# Altium PCB UNIT_V3_LVDS_Board.PcbDoc
Units mil, origin at the board's own origin, x right, y up, seen from the top; angles counter-clockwise.
Board outline 1775 x 3445 mil, 4 copper layers (Top Layer, Signal Layer 1, Signal Layer 2, Bottom Layer), stack 30.634 mil thick; 22 components, 97 nets, 269 pads, 87 vias.
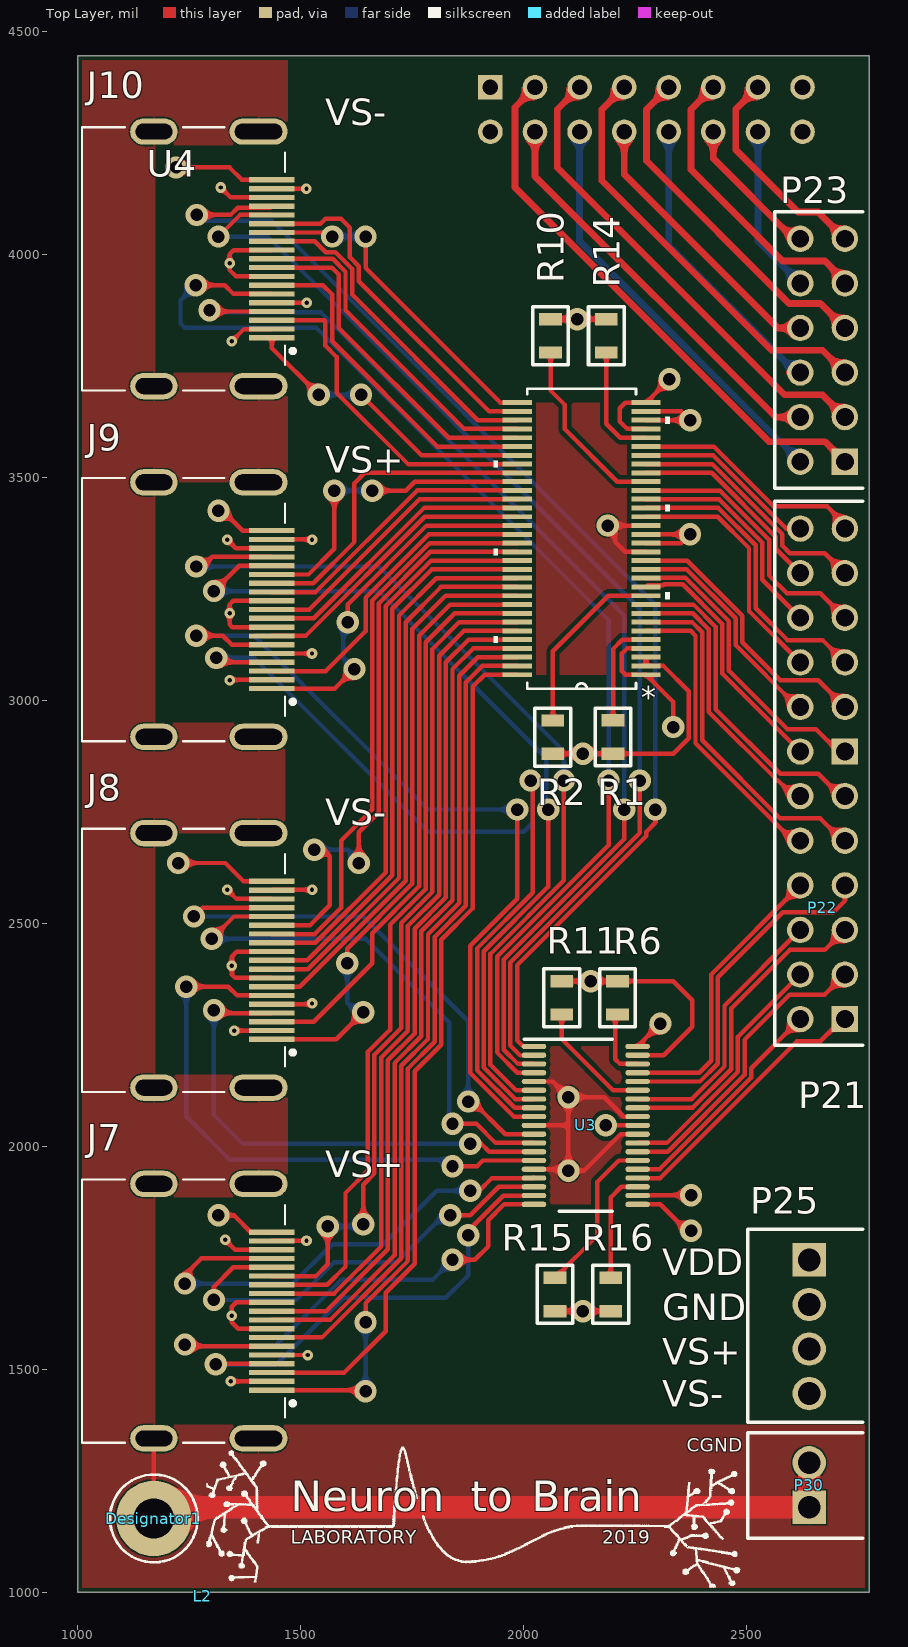
[diagram p0: Top Layer view]
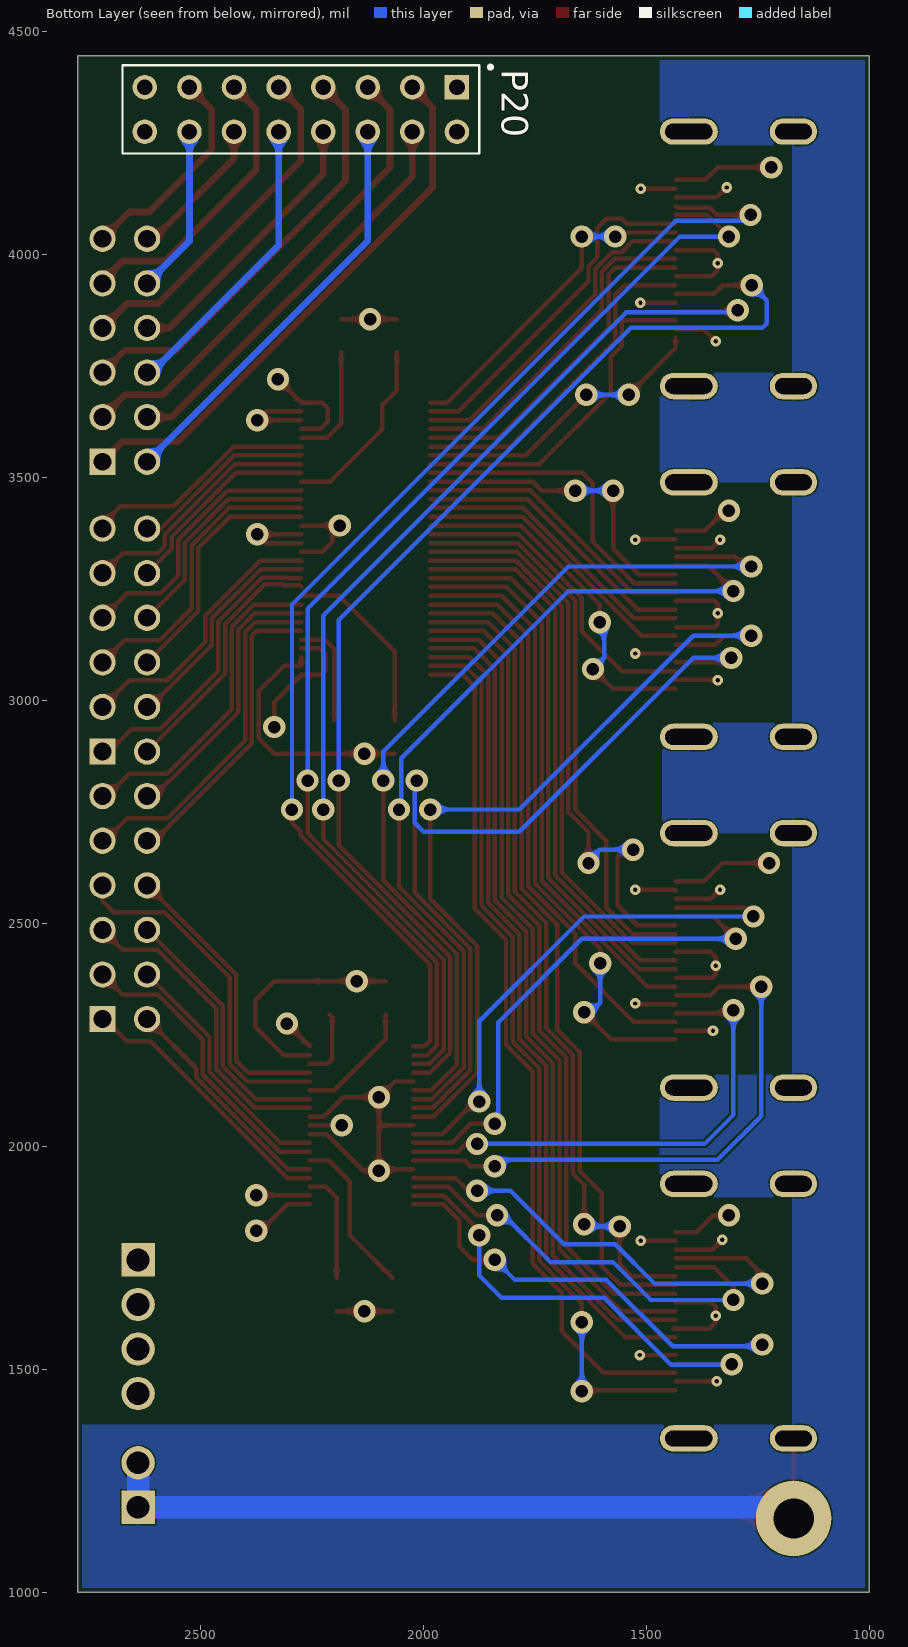
[diagram p1: Bottom Layer view, seen from below]
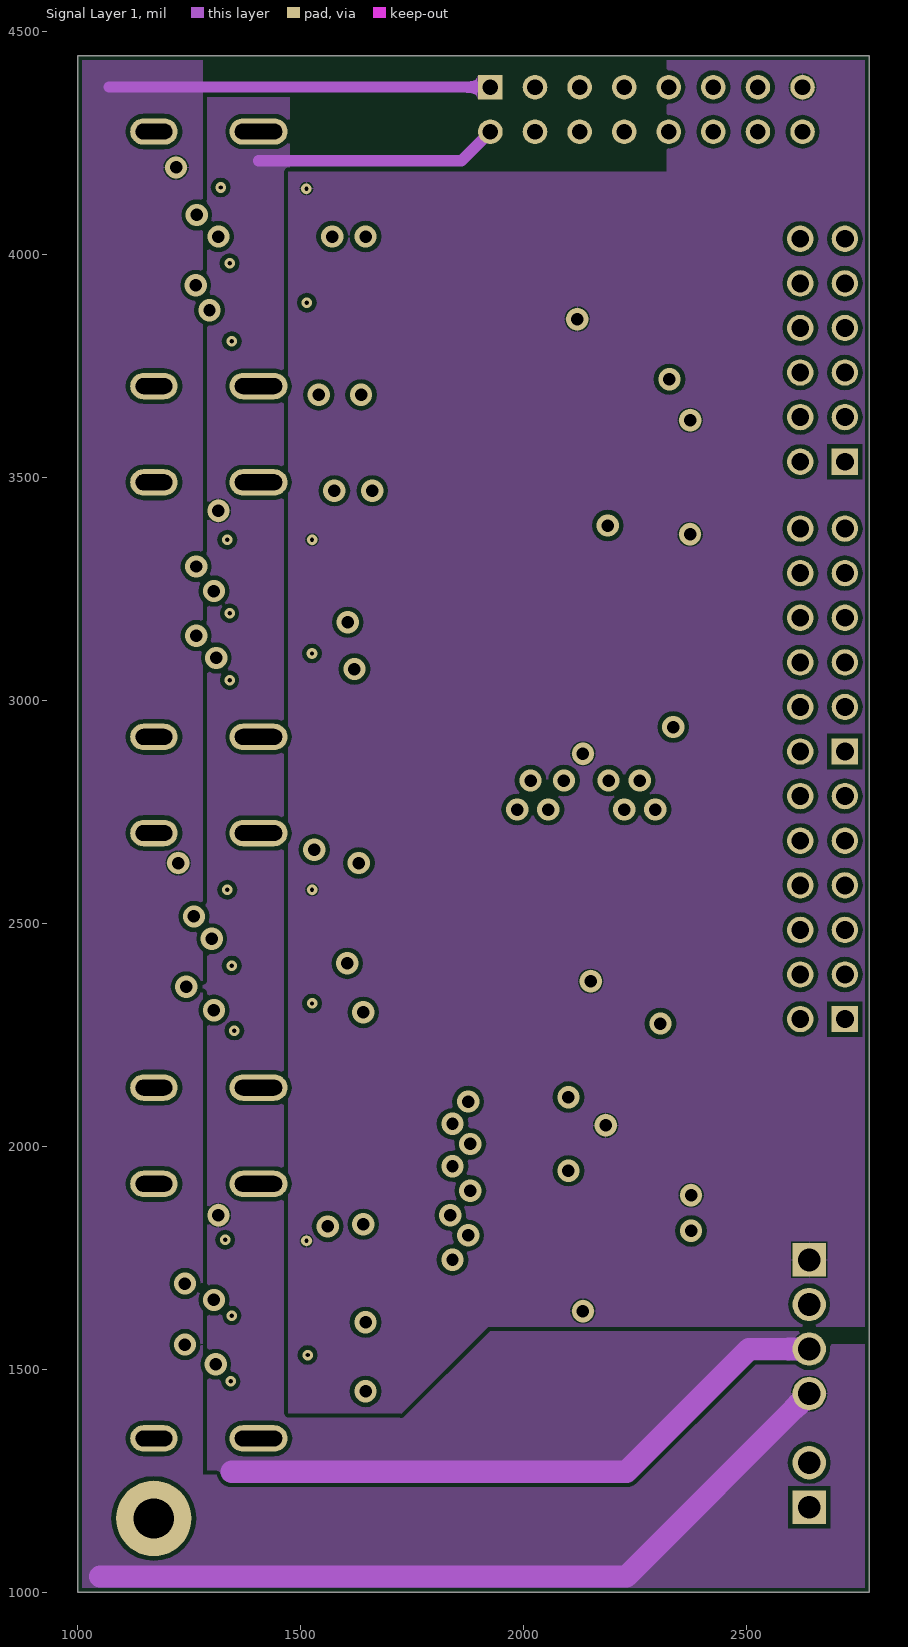
[diagram p2: Signal Layer 1]
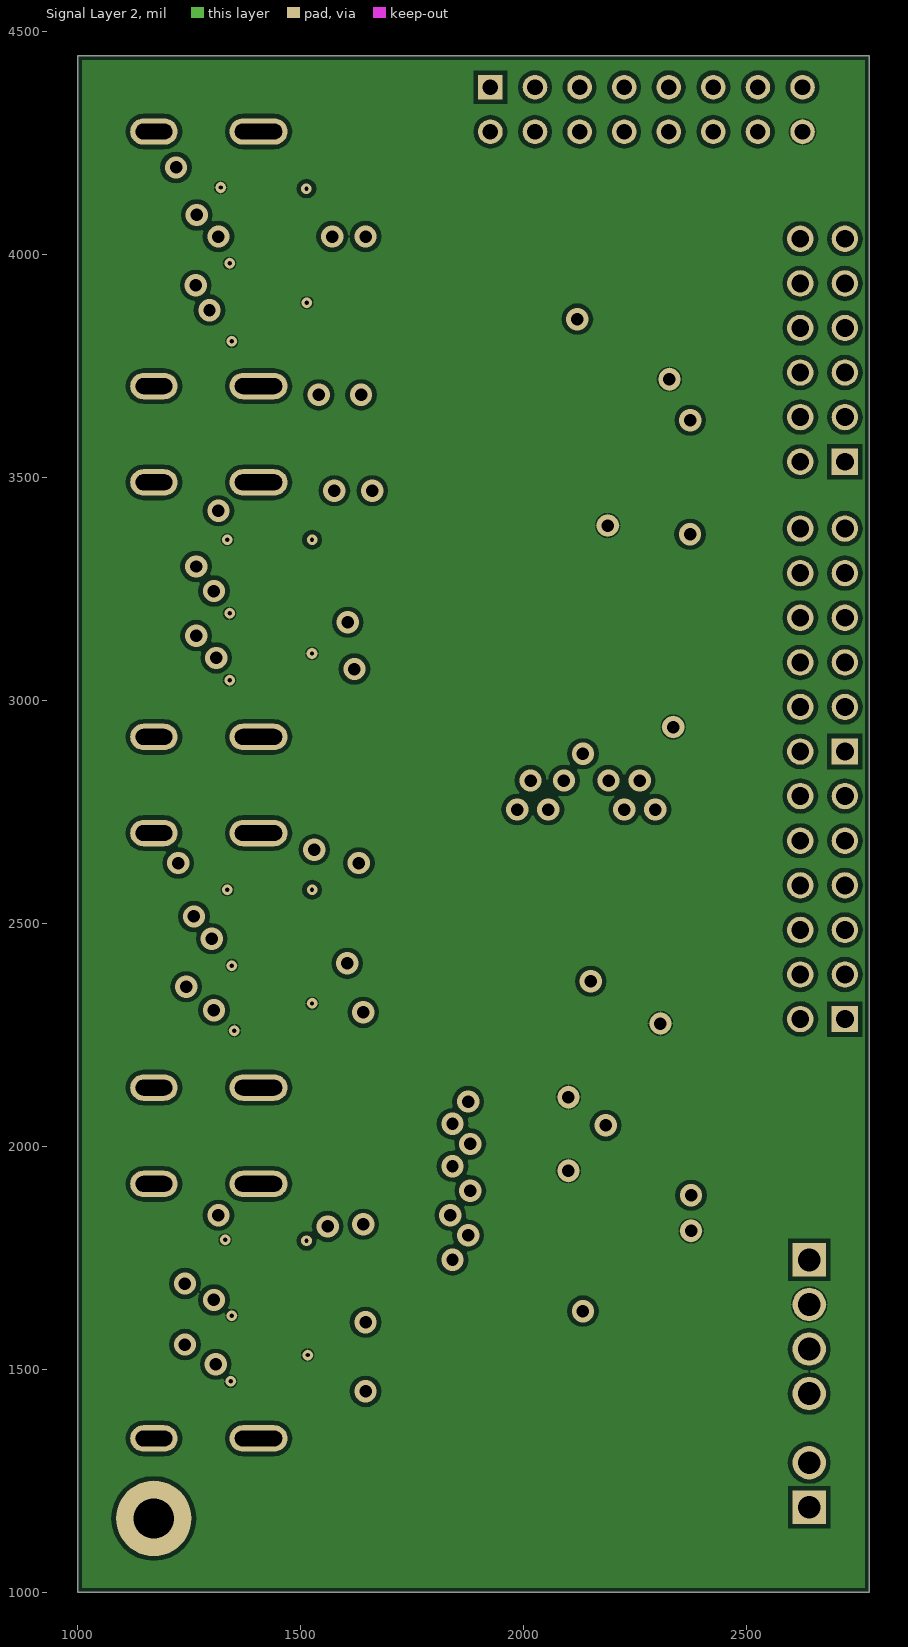
[diagram p3: Signal Layer 2]
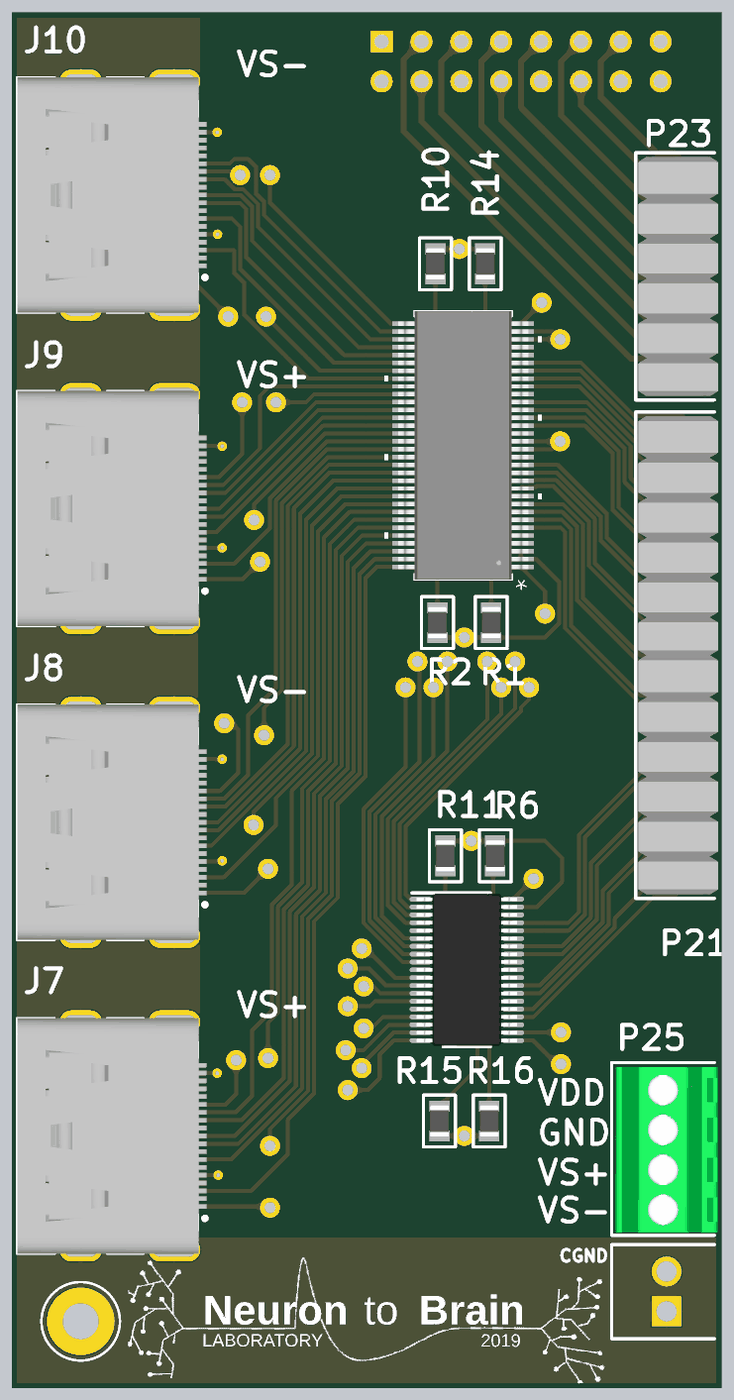
[diagram p4: 3D render of the assembled board from above, using the file's embedded part models]

## Layer stack, top to bottom
Top Solder: solder mask 0.4, Solder Resist, Dk 3.5
Top Layer: signal copper 1.4
Dielectric 1: core 10, FR-4, Dk 4.2
Signal Layer 1: signal copper 1.417
Dielectric 4: prepreg 5, Dk 4.2
Signal Layer 2: signal copper 1.417
Dielectric 3: core 10, Dk 4.2
Bottom Layer: signal copper 1.4
Bottom Solder: solder mask 0.4, Solder Resist, Dk 3.5

## Board outline
1000,1000 2775,1000 2775,4445 1000,4445

## Design rules (kind name [scope] priority, off if disabled: settings)
BoardOutlineClearance [All] p1: gap=9.84 ignorepadtopadclearanceinfootprint=FALSE
Clearance [All] p1: gap=5 ignorepadtopadclearanceinfootprint=FALSE
ComponentClearance [All] p1: gap=3.94 collisioncheckmode=3 verticalgap=3.94 showdistances=FALSE
DiffPairsRouting [All] p1 off: maxlimit=10 minlimit=10 mostfreqgap=10 toplayer_minwidth=15 toplayer_maxwidth=15 toplayer_prefwidth=15 midlayer1_minwidth=15 midlayer1_maxwidth=15 midlayer1_prefwidth=15 midlayer2_minwidth=15 midlayer2_maxwidth=15 midlayer2_prefwidth=15 bottomlayer_minwidth=15 bottomlayer_maxwidth=15 bottomlayer_prefwidth=15 maxuncoupledlength=500
HoleSize [All] p1: absolutevalues=TRUE maxlimit=100 minlimit=3.94 maxpercent=80.000 minpercent=20.000
HoleToHoleClearance [All] p1: gap=10.83 allowstackedmicrovias=TRUE
MinimumAnnularRing [All] p1: minimumring=3.94
MinimumSolderMaskSliver [All] p1: minsoldermaskwidth=2.95
PlaneClearance [All] p1: clearance=15
PlaneConnect [All] p1: planeconnectstyle=Relief reliefexpansion=5.91 reliefentries=4 reliefconductorwidth=2.95 reliefairgap=2.95
PolygonConnect [All] p1: connectstyle=Relief reliefconductorwidth=2.95 reliefentries=4 polygonreliefangle="90 Angle" airgapwidth=2.95
RoutingVias [All] p1: holewidth=9.84 width=23.62 viastyle="Through Hole" minholewidth=3.94 minwidth=7.87 maxholewidth=28 maxwidth=50
SilkToSilkClearance [All] p1: silktosilkclearance=5.91
SilkToSolderMaskClearance [IsPad] p1: minsilkscreentomaskgap=5.91 clearancetoexposedcopper=TRUE
SolderMaskExpansion [All] p1: expansion=0 istentingtop=FALSE
Width [All] p1: maxlimit=1968.5 minlimit=2.95 preferedwidth=5.91
21 further rules are at their usual default settings.

## Classes and differential pairs
differential pair B_SCLK1: +B_SCLK1_P -B_SCLK1_N
differential pair B_MOSI1: +B_MOSI1_P -B_MOSI1_N
differential pair B_MISO1: +B_MISO1_P -B_MISO1_N
differential pair SCLK4: +SCLK4_P -SCLK4_N
differential pair SCLK3: +SCLK3_P -SCLK3_N
differential pair SCLK2: +SCLK2_P -SCLK2_N
differential pair SCLK1: +SCLK1_P -SCLK1_N
differential pair nCS4: +nCS4_P -nCS4_N
differential pair nCS3: +nCS3_P -nCS3_N
differential pair nCS2: +nCS2_P -nCS2_N
differential pair nCS1: +nCS1_P -nCS1_N
differential pair MOSI8: +MOSI8_P -MOSI8_N
differential pair MOSI7: +MOSI7_P -MOSI7_N
differential pair MOSI6: +MOSI6_P -MOSI6_N
differential pair MOSI5: +MOSI5_P -MOSI5_N
differential pair MOSI4: +MOSI4_P -MOSI4_N
differential pair MOSI3: +MOSI3_P -MOSI3_N
differential pair MOSI2: +MOSI2_P -MOSI2_N
differential pair MOSI1: +MOSI1_P -MOSI1_N
differential pair MISO8: +MISO8_P -MISO8_N
differential pair MISO7: +MISO7_P -MISO7_N
differential pair MISO6: +MISO6_P -MISO6_N
differential pair MISO5: +MISO5_P -MISO5_N
differential pair MISO4: +MISO4_P -MISO4_N
differential pair MISO3: +MISO3_P -MISO3_N
differential pair MISO2: +MISO2_P -MISO2_N
differential pair MISO1: +MISO1_P -MISO1_N

## Components (designator, comment, footprint, x,y, rotation, side; value= is the part's Value field where it differs from the comment)
Designator1 "Comment" "M2X0.4 Plated Loose Fit" 1170,1165 r0 top
J7 "1747981-2" TE_1747981-2_1747981-2(Primary) 1405,1630 r270 top
J8 "1747981-2" TE_1747981-2_1747981-2(Primary) 1405,2416.67 r270 top
J9 "1747981-2" TE_1747981-2_1747981-2(Primary) 1405,3203.33 r270 top
J10 "1747981-2" TE_1747981-2_1747981-2(Primary) 1405,3990 r270 top
L2 "Logo" N2BL_LOGO 1280,990 r0 top
P20 "Header 8X2" TE_534998-8 2275,4325 r0 bottom
P21 "Header 6X2" 0010897120 2720,2885 r90 top
P22 "Header 6X2" 0010897120 2720,2285 r90 top
P23 "Header 6X2" 0010897120 2720,3535 r90 top
P25 "Header 4" OSTVN04A150 2640,1745 r270 top
P30 "Header 2" OSTVN02A150 2640,1190 r90 top
R1 "0" R0805 2200,2955 r270 top
R2 "0" R0805 2065,2954.8 r270 top
R6 "0" R0805 2210,2295.2 r90 top
R10 "0" R0805 2060,3780 r90 top
R11 "0" R0805 2085,2295.2 r90 top
R14 "0" R0805 2185,3780 r90 top
R15 "0" R0805 2070,1704.8 r270 top
R16 "0" R0805 2195,1704.8 r270 top
U3 "SN65LVDT388ADBT" DBT0038A_N 2138.86,2046.57 r0 top value=Value
U4 "Part Number: sn75lvds387_dgg_64" DGG64 2129.5,3362.36 r180 top locked value=Value

## Footprints (in the part's own frame and the unit in brackets; to place one, negate y for a bottom-side part, rotate by r counter-clockwise, add the part's x,y. Pads: shape width x height; smd on the part's side, far side on the other; paste and mask are expansions set on the pad)
0010897120 [mm] "CONN HEADER VERT 12POS 2.54MM"
  rect 1.5x1.5 hole 1.02: 1(0,0)
  round 1.5 hole 1.02: 2(0,2.54) 3(2.54,0) 4(2.54,2.54) 5(5.08,0) 6(5.08,2.54) 7(7.62,0) 8(7.62,2.54) 9(10.16,0) 10(10.16,2.54) 11(12.7,0) 12(12.7,2.54)
  silkscreen extent -1.5,-1.02 14.25,4, body extent -1.25,-1.25 13.99,3.83, height 8.74
DBT0038A_N [mm]
  oval 1.4x0.3 smd paste+0 mask+0: 1(-2.95,4.5) 2(-2.95,4) 3(-2.95,3.5) 4(-2.95,3) 5(-2.95,2.5) 6(-2.95,2) 7(-2.95,1.5) 8(-2.95,1) 9(-2.95,0.5) 10(-2.95,0) 11(-2.95,-0.5) 12(-2.95,-1) 13(-2.95,-1.5) 14(-2.95,-2) 15(-2.95,-2.5) 16(-2.95,-3) 17(-2.95,-3.5) 18(-2.95,-4) 19(-2.95,-4.5) 20(2.95,-4.5) 21(2.95,-4) 22(2.95,-3.5) 23(2.95,-3) 24(2.95,-2.5) 25(2.95,-2) 26(2.95,-1.5) 27(2.95,-1) 28(2.95,-0.5) 29(2.95,0) 30(2.95,0.5) 31(2.95,1) 32(2.95,1.5) 33(2.95,2) 34(2.95,2.5) 35(2.95,3) 36(2.95,3.5) 37(2.95,4) 38(2.95,4.5)
  silkscreen extent -3.5,-4.9 1.5,4.9, body extent -3.2,-4.85 3.2,4.85, height 1.13
DGG64 [mil]
  rect 66x11 smd: 1(-144.5,305.12) 2(-144.5,285.43) 3(-144.5,265.75) 4(-144.5,246.06) 5(-144.5,226.38) 6(-144.5,206.69) 7(-144.5,187.01) 8(-144.5,167.32) 9(-144.5,147.64) 10(-144.5,127.95) 11(-144.5,108.27) 12(-144.5,88.58) 13(-144.5,68.9) 14(-144.5,49.21) 15(-144.5,29.53) 16(-144.5,9.84) 17(-144.5,-9.84) 18(-144.5,-29.53) 19(-144.5,-49.21) 20(-144.5,-68.9) 21(-144.5,-88.58) 22(-144.5,-108.27) 23(-144.5,-127.95) 24(-144.5,-147.64) 25(-144.5,-167.32) 26(-144.5,-187.01) 27(-144.5,-206.69) 28(-144.5,-226.38) 29(-144.5,-246.06) 30(-144.5,-265.75) 31(-144.5,-285.43) 32(-144.5,-305.12) 33(144.5,-305.12) 34(144.5,-285.43) 35(144.5,-265.75) 36(144.5,-246.06) 37(144.5,-226.38) 38(144.5,-206.69) 39(144.5,-187.01) 40(144.5,-167.32) 41(144.5,-147.64) 42(144.5,-127.95) 43(144.5,-108.27) 44(144.5,-88.58) 45(144.5,-68.9) 46(144.5,-49.21) 47(144.5,-29.53) 48(144.5,-9.84) 49(144.5,9.84) 50(144.5,29.53) 51(144.5,49.21) 52(144.5,68.9) 53(144.5,88.58) 54(144.5,108.27) 55(144.5,127.95) 56(144.5,147.64) 57(144.5,167.32) 58(144.5,187.01) 59(144.5,206.69) 60(144.5,226.38) 61(144.5,246.06) 62(144.5,265.75) 63(144.5,285.43) 64(144.5,305.12)
  silkscreen extent -198,-336 198,337, body extent -164,-336 164,337, height 47
"M2X0.4 Plated Loose Fit" [mm] "Loose fit, plated land pattern for metric M2 (2mm radius) screw by 0.4mm length screw"
  round 4.3 hole 2.3 unplated: 1(0,0)
  silkscreen extent -2.5,-2.5 2.5,2.5
N2BL_LOGO [mil] "Example template footprint"
  silkscreen extent 8,19 1205,335
OSTVN02A150 [mm] "2 Position Wire to Board Terminal Block Horizontal with Board 0.100\" (2.54mm) Through Hole"
  rect 1.9x1.9 hole 1.3: 1(0,0)
  round 1.9 hole 1.3: 2(2.54,0)
  silkscreen extent -1.75,-3.05 4.25,3.5
OSTVN04A150 [mm] "4 Position Wire to Board Terminal Block Horizontal with Board 0.100\" (2.54mm) Through Hole"
  rect 1.9x1.9 hole 1.3: 1(0,0)
  round 1.9 hole 1.3: 2(2.54,0) 3(5.08,0) 4(7.62,0)
  silkscreen extent -1.75,-3.5 9.25,3.05, body extent -1.47,-3.25 9.09,3.25, height 8.65
R0805 [mm]
  rect 0.7x1.3 smd: 1(0,0) 2(1.9,0)
  silkscreen extent -0.7,-1.02 2.6,1.02, body extent -0.05,-0.6 1.95,0.6, height 0.71
TE_534998-8 [mm] "CONN RCPT 16POS 0.1 GOLD PCB"
  rect 1.398x1.398 hole 0.89: 1(-8.89,-1.27)
  round 1.398 hole 0.89: 2(-8.89,1.27) 3(-6.35,-1.27) 4(-6.35,1.27) 5(-3.81,-1.27) 6(-3.81,1.27) 7(-1.27,-1.27) 8(-1.27,1.27) 9(1.27,-1.27) 10(1.27,1.27) 11(3.81,-1.27) 12(3.81,1.27) 13(6.35,-1.27) 14(6.35,1.27) 15(8.89,-1.27) 16(8.89,1.27)
  silkscreen extent -10.89,-2.51 10.16,2.51, body extent -10.16,-2.51 10.16,2.51, height 6.22
TE_1747981-2_1747981-2(Primary) [mm]
  rect 0.3x2.6 smd: 1(4.5,0.76) 2(4,0.76) 3(3.5,0.76) 4(3,0.76) 5(2.5,0.76) 6(2,0.76) 7(1.5,0.76) 8(1,0.76) 9(0.5,0.76) 10(0,0.76) 11(-0.5,0.76) 12(-1,0.76) 13(-1.5,0.76) 14(-2,0.76) 15(-2.5,0.76) 16(-3,0.76) 17(-3.5,0.76) 18(-4,0.76) 19(-4.5,0.76)
  oval 1.5x3.3 hole 0.9 slot 2.7 at 90 deg: SH1(-7.25,0) SH2(7.25,0)
  oval 1.5x2.7 hole 0.9 slot 2.1 at 90 deg: SH3(-7.25,-5.96) SH4(7.25,-5.96)
  silkscreen extent -7.5,-10.05 7.5,2.07, body extent -7.5,-10 7.5,2, height 6.28

## Part data
J7 J8 J9 J10: "Conn HDMI RCP 19 POS 0.5mm Solder ST SMD 19 Terminal 1 Port T/R", Manufacturer="TE Connectivity", Package=None, Supplier Part Number 1=A130924CT-ND, Availability=Unavailable, ComponentLink1Description=Datasheet, ComponentLink1URL=https://www.te.com/commerce/DocumentDelivery/DDEController?Action=srchrtrv&DocNm=1747981&DocType=Customer+Drawing&DocLang=English, Detailed Description="HDMI Receptacle Connector 19 Position Panel Mount; Surface Mount, Right Angle; Through Hole", EU_RoHS_Compliance=Compliant, Manufacturer Part Number=1747981-2, MF="TE Connectivity", MP=1747981-2, price=None, Pricing1="1  6.31000  $6.31  10  6.04800  $60.48  25  5.54400  $138.60  50  5.29240  $264.62  100  5.04030  $504.03 (CAD)", SnapEDA_Link=https://www.snapeda.com/parts/1747981-2/TE%20Connectivity%20AMP%20Connectors/view-part/?ref=snap, Stock1=1,426, Supplier 1=Digikey, Supplier Link 1=https://www.digikey.ca/product-detail/en/te-connectivity-amp-connectors/1747981-2/A130924CT-ND/8602669, TE_purchase_URL=https://www.te.com/usa-en/product-1747981-2.html?te_bu=Cor&te_type=disp&te_campaign=seda_glo_cor-seda-global-disp-prtnr-fy19-seda-model-bom-cta_sma-317_1&elqCampaignId=32493
L2: library part "Neuron To Brain Lab Logo"
P20: "Header, 8-Pin, Dual row", Manufacturer="TE Connectivity", Manufacturer Part Number=534998-8, Supplier Part Number 1=A26489-ND, ComponentLink1Description=Datasheet, ComponentLink1URL=https://www.te.com/commerce/DocumentDelivery/DDEController?Action=srchrtrv&DocNm=534998&DocType=Customer+Drawing&DocLang=English, LatestRevisionDate=17-Jul-2002, LatestRevisionNote="Re-released for DXP Platform.", Pricing1="1  5.59000  $5.59  28  4.92321  $137.85  112  4.47580  $501.29  504  3.80446  $1,917.45  1,008  3.24498  $3,270.94 (CAD)", Publisher="Altium Limited", Stock1=13,776, Supplier 1=Digikey, Supplier Link 1=https://www.digikey.ca/product-detail/en/te-connectivity-amp-connectors/534998-8/A26489-ND/298054
P21 P22 P23: "Header, 6-Pin, Dual row", Manufacturer=Molex, Manufacturer Part Number=0010897120, Supplier Part Number 1=WM13108-ND, ComponentLink1Description=Datasheet, ComponentLink1URL=https://www.molex.com/pdm_docs/sd/010897120_sd.pdf, LatestRevisionDate=17-Jul-2002, LatestRevisionNote="Re-released for DXP Platform.", Manufacturer Link=https://www.molex.com/molex/products/datasheet.jsp?part=active/0010897120_PCB_HEADERS.xml, Pricing1="1  1.65000  $1.65 (CAD)", Stock1=2,645, Supplier 1=Digikey, Supplier Link 1=https://www.digikey.com/product-detail/en/molex/0010897120/WM13108-ND/3068090
  P22 P23: Publisher="Altium Limited"
P25: "Header, 4-Pin", Manufacturer="On Shore Technology Inc.", Manufacturer Part Number=OSTVN04A150, Supplier Part Number 1=ED10563-ND, ComponentLink1Description=Datasheet, ComponentLink1URL=http://www.on-shore.com/wp-content/uploads/OSTVNXXA150.pdf, Detailed Description="4 Position Wire to Board Terminal Block Horizontal with Board 0.100\" (2.54mm) Through Hole", LatestRevisionDate=17-Jul-2002, LatestRevisionNote="Re-released for DXP Platform.", Manufacturer Link=https://www.on-shore.com/part/ostvnxxa150-terminal-block-one-piece-rising-clamp/, Pitch (imperial)=100mil, Pricing 1="1  1.38000  $1.38  10  0.96900  $9.69  25  0.90400  $22.60  50  0.82040  $41.02  100  0.81680  $81.68  250  0.68972  $172.43  500  0.65340  $326.70  1,000  0.58080  $580.80  5,000  0.47190  $2,359.50 (CAD)", Publisher="Altium Limited", Stock 1=8,195, Supplier 1=Digikey, Supplier Link 1=https://www.digikey.com/product-detail/en/on-shore-technology-inc/OSTVN04A150/ED10563-ND/1588864
P30: "Header, 2-Pin", Manufacturer="On Shore Technology Inc.", Manufacturer Part Number=OSTVN02A150, Supplier Part Number 1=ED10561-ND, LatestRevisionDate=17-Jul-2002, LatestRevisionNote="Re-released for DXP Platform.", Manufacturer Link=https://www.on-shore.com/part/ostvnxxa150-terminal-block-one-piece-rising-clamp/, Pricing1="1  1.29000  $1.29 (CAD)", Publisher="Altium Limited", Stock1=21,116, Supplier 1=Digikey, Supplier Link 1=https://www.digikey.ca/product-detail/en/on-shore-technology-inc/OSTVN02A150/ED10561-ND/1588862
R1 R2 R6 R10 R11 R14 R15 R16: library part RES0, "RC0805JR-070RL", Case/Package=0805, Case Code (Metric)=2012, Manufacturer=Yageo, Max Operating Temperature=155°C, Max Power Dissipation=125mW, Min Operating Temperature=-55°C, Package Quantity=1, Resistance=0R, Supplier Part Number 1=311-0.0ARCT-ND, Temperature Coefficient=100ppm/°C, Tolerance=1%, Voltage Rating=150V, Case Code (Imperial)=0805, Composition="Thick Film", Depth=1.25mm, Lead Free="Lead Free", Length=2mm, Manufacturer Part Number=RC0805JR-070RL, Military Standard=Not, Number of Terminations=2, Packaging="Tape and Reel", Power Rating=125mW, Pricing 1="1=0.15;  10=0.055;  25=0.0408;  50=0.0308;  100=0.0229;  250=0.01740;  500=0.0139;  1000=0.01024 (CAD)", REACH SVHC=Unknown, Stock 1=3924855, Supplier 1=Digi-Key, Supplier Link 1=https://www.digikey.ca/product-detail/en/yageo/RC0805JR-070RL/311-0.0ARCT-ND/731163, Termination=SMD/SMT
U3: library part SN65LVDT388ADBTR, "IC OCTAL LVDS RECEIVER 38-TSSOP", Manufacturer="Texas Instruments", Supplier Part Number 1=296-6899-5-ND, Copyright="Copyright (C) 2018 Accelerated Designs. All rights reserved", Manufacturer Link=http://www.ti.com/product/SN65LVDT388A?keyMatch=SN65LVDT388A&tisearch=Search-EN-Products, Manufacturer Part Number=SN65LVDT388ADBT, PartNumber=SN65LVDT388ADBTR, Pricing1="Price Break  Unit Price  Extended Price  1  6.13000  $6.13  10  5.51000  $55.10  50  5.20880  $260.44  100  4.51430  $451.43  500  3.84290  $1,921.45  1,000  3.24100  $3,241.00  2,500  3.07895  $7,697.38 (CAD)", RefDes=RefDes, Stock1=5,642, Supplier 1=Digikey, Supplier Link 1=https://www.digikey.com/products/en?mpart=SN65LVDT388ADBT&v=296, Type=DEV
U4: library part SN75LVDS387_DGG_64, "16-Channel LVDS Transmitter", Manufacturer="Texas Instruments", Manufacturer_Part_Number=sn75lvds387_dgg_64, Manufacturer Part Number=SN75LVDS387DGG, PACKAGE_DESIGNATOR=DGG, Supplier Part Number 1=296-2367-5-ND, Copyright="Copyright (C) 2018 Accelerated Designs. All rights reserved", Datasheet_URL=http://www.ti.com/lit/gpn/SN75LVDS387, FAMILY_NAME="LVDS PHY (<800MBPS)", GENERIC_PART_NUMBER=SN75LVDS387, INDUSTRY_STD_PKG_TYPE=TSSOP, Manufacturer Link=http://www.ti.com/product/SN75LVDS387, PIN_COUNT=64, Pricing1="Price Break  Unit Price  Extended Price  1  11.73000  $11.73  10  10.59500  $105.95  25  10.10240  $252.56  100  8.77180  $877.18  500  7.63840  $3,819.20  1,000  6.65280  $6,652.80 (CAD)", RefDes=RefDes, Stock1=3,375, Supplier 1=Digikey, Supplier Link 1=https://www.digikey.com/products/en?mpart=SN75LVDS387DGG&v=296, Type=DEV, Vendor="Texas Instruments"

## Via types
v1: diameter 50, hole 28, Top Layer to Bottom Layer, 67 vias
v2: diameter 23.62, hole 9.84, Top Layer to Bottom Layer, 20 vias

## Nets (pads, with @x,y where several pads share a name; then routed paths per layer and width w, separated by ;. In a path a pad name is that pad's centre, name@x,y a point inside that pad or via, vN(x,y) a via of type N, cw(c..) or ccw(c..) an arc to the next point about the centre after c; other vN are vias at no path point)
B_CS1_N: P20.14 P23.10 | length 379.4
  Bottom Layer w15: P20.14 2525,4030 P23.10
B_CS1_P: P20.12 P23.12 | length 329.6
  Top Layer w15: P20.12 2425,4215 2605,4035 P23.12
B_MISO1_N: P20.11 P23.9 | length 659.3
  Top Layer w15: P20.11 2375,4325 2375,4190 2580,3985 2675,3985 2720,3940 P23.9
B_MISO1_P: P20.13 P23.11 | length 488.6
  Top Layer w15: P20.13 2475,4325 2475,4235 2615,4095 2660,4095 P23.11
B_MISO2_N: P20.6 P23.2 | length 945
  Bottom Layer w15: P20.6 2125,4030 P23.2
B_MISO2_P: P20.4 P23.4 | length 918.7
  Top Layer w15: P20.4 2025,4175 2565,3635 P23.4
B_MOSI1_N: P20.7 P23.5 | length 953.8
  Top Layer w15: P20.7 2175,4325 2175,4165 2555,3785 2670,3785 P23.5
B_MOSI1_P: P20.9 P23.7 | length 786
  Top Layer w15: P20.9 2275,4325 2275,4210 2595,3890 2665,3890 P23.7
B_MOSI2_N: P20.10 P23.6 | length 693.1
  Top Layer w15: P23.6@2595,3735 P23.6
  Bottom Layer w15: P20.10 2325,4020 2610,3735 P23.6
B_MOSI2_P: P20.8 P23.8 | length 632.9
  Top Layer w15: P20.8 2225,4180 2570,3835 P23.8
B_SCLK1_N: P20.3 P23.1 | length 1238.4
  Top Layer w15: P20.3 1980,4330 1980,4150 2550,3580 2675,3580 P23.1
B_SCLK1_P: P20.5 P23.3 | length 1077.7
  Top Layer w15: P20.5 2075,4325 2075,4195 2585,3685 2670,3685 P23.3
bGND: J7.2 J7.5 J7.8 J7.11 J7.17 J8.2 J8.5 J8.8 J8.11 J8.17 J9.2 J9.5 J9.8 J9.11 J9.17 J10.2 J10.5 J10.8 J10.11 J10.17 P20.16 P25.2 U3.5 U3.10 U3.15 U3.20 U3.28 U3.30 U3.38 U4.1 U4.4 U4.15 U4.18 U4.29 U4.32 | length 3850.8
  Top Layer w10: v2(1320,4150) 1342.2,4127.8 J10.17 ; v2(1330,1790) 1352.2,1767.8 J7.17 ; v2(1335,2575) 1355.54,2554.46 J8.17 ; v2(1335,3360) 1353.87,3341.13 J9.17 ; v2(1340,3045) 1340.85,3045.85 J9.2 ; v2(1342.52,1472.52) J7.2 ; v2(1345,3805) 1372.52,3832.52 J10.2 ; v2(1350.81,2259.19) J8.2 ; J7.5 v2(1515,1531.57) ; J7.11 1354.69,1649.69 1345,1640 v2(1345,1620) 1345,1605 1359.37,1590.63 J7.8 J7.8@1439.92,1590.63 ; J8.5 1523.24,2318.24 v2(1525,2320) ; J8.8 1352.7,2377.3 1345,2385 v2(1345,2405) 1345,2425 1356.35,2436.35 J8.11 ; J9.5 v2(1524.91,3104.91) ; J9.8 1346.04,3163.96 1340,3170 v2(1340,3195) 1340,3215 1348.02,3223.02 J9.11 ; J10.5 v2(1513.43,3891.57) ; J10.8 1354.37,3950.63 1340,3965 v2(1340,3980) 1340,4000 1349.68,4009.68 J10.11 ; U3.15 2096.85,1948.15 v1(2100,1945) ; U3.10 2100,2046.57 ; U3.5 2065,2145 v1(2100,2110) ; U3.20 2305.59,1869.41 2375,1800 v1(2375,1810) ; U3.28 2216.89,2026.89 2135,1945 v1(2100,1945) ; U3.30 2223.74,2066.26 2180,2110 v1(2100,2110) ; U3.38 v1(2306.26,2275) ; U4.4 2231.3,3116.3 2220,3105 2220,3065 2227.76,3057.24 U4.1 2335,2996.24 v1(2335,2940) ; U4.15 2227.17,3332.83 2205,3355 2205,3391.89 U4.18 ; U4.29 2231.57,3608.43 2215,3625 2215,3655 2227.48,3667.48 U4.32 v1(2326.52,3720) ; v1(2100,1945) 2100,2046.57 ; 2100,2046.57 v1(2100,2110)
  Bottom Layer w10: v1(2100,1945) v1@2115,1945 ; v1@2185,3395 v1(2188.11,3391.89) ; v1(2306.26,2275) v1@2315,2275
bVDD: J7.18 J8.18 J9.18 J10.18 P20.15 P25.1 R1.2 R2.2 R6.2 R10.2 R11.2 R14.2 R15.2 R16.2 U3.21 U3.29 U3.37 U4.2 U4.3 U4.16 U4.17 U4.30 U4.31 | length 2313.2
  Top Layer w10: J7.18 v2(1512.52,1787.48) ; J8.18 1435.78,2575 v2(1525,2575) ; J9.18 1524.19,3360.81 v2(1525,3360) ; J10.18 v2(1512.48,4147.48) ; R10.2 v1(2120,3854.8) R14.2 ; R2.2 2065.2,2880.2 v1(2132.6,2880.2) R1.2 2299.8,2880.2 2300,2880 2335,2880 2370,2915 2370,3020 2313.07,3076.93 U4.2 U4.3 ; R15.2 v1(2132.5,1630) ; R11.2 v1(2150,2370) R6.2 2335,2370 2377.5,2327.5 2377.5,2267.5 2314.06,2204.06 U3.37 ; v1@2132.5,1612.5 v1(2132.5,1630) ; v1(2183.43,2046.57) U3.29 ; R16.2 v1(2132.5,1630) ; U3.21 2255.91,1890 v1(2375,1890) ; U4.16 2353.11,3352.52 v1(2372.8,3372.2) U4.17 ; U4.30 v1(2373.11,3628.11) 2353.42,3647.8 U4.31
  Bottom Layer w10: v1(2372.8,3372.2) v1@2380,3365 ; v1(2373.11,3628.11) v1@2375,3630 ; v1@2375,1880 v1(2375,1890)
bVSTIM+: J7.19 J9.19 P20.2 P25.3 | length 2229.8
  Top Layer w10: v1(1315,1845) 1350,1845 1387.83,1807.17 J7.19 ; v1(1315,3425) 1325,3425 1369.5,3380.5 J9.19
  Signal Layer 1 w25: 1405,4210 1860,4210 P20.2
  Signal Layer 1 w50: 1345,1270 2230,1270 2505,1545 P25.3
bVSTIM-: J8.19 J10.19 P20.1 P25.4 | length 3068.3
  Top Layer w10: v1(1220,4195) 1340,4195 1367.83,4167.17 J10.19 ; v1(1225,2635) 1330,2635 1371.17,2593.83 J8.19
  Signal Layer 1 w25: 1070,4375 P20.1
  Signal Layer 1 w50: 1050,1034.84 2229.84,1034.84 P25.4
cGND: Designator1.1 J7.SH1 J7.SH2 J7.SH3 J7.SH4 J8.SH1 J8.SH2 J8.SH3 J8.SH4 J9.SH1 J9.SH2 J9.SH3 J9.SH4 J10.SH1 J10.SH2 J10.SH3 J10.SH4 P30.1 P30.2 | length 3340.4
  Top Layer w10: Designator1.1 1170,1344.21 J7.SH4
  Top Layer w50: Designator1.1 1195,1190 P30.1 P30.2
  Bottom Layer w50: Designator1.1 1195,1190 P30.1 P30.2
CS1_SE: P22.10 U4.6 | length 682.3
  Top Layer w10: U4.6 2374.33,3155.67 2385,3145 2385,2903.79 2603.79,2685 P22.10
CS2_SE: P21.2 U4.11 | length 568.9
  Top Layer w10: U4.11 2278.19,3258.28 2312.86,3258.28 2314.58,3260 2356.21,3260 2445,3171.21 2445,3060 P21.2
CS3_SE: P21.6 U4.19 | length 564.1
  Top Layer w10: U4.19 2434.79,3411.57 2505,3341.36 2505,3200 P21.6
CS4_SE: P21.10 U4.24 | length 454.6
  Top Layer w10: U4.24 2421.21,3510 2565,3366.21 2565,3340 P21.10
MISO1_N: J7.15 U3.17 | length 1000.7
  Top Layer w10: v1(1305,1655) 1305,1685 1348.43,1728.43 J7.15 ; v1(1835,1845) 1880,1845 1943.78,1908.78 U3.17
  Bottom Layer w10: v1(1305,1655) 1490,1655 1575,1740 1715,1740 1820,1845 v1(1835,1845)
MISO1_P: J7.16 U3.16 | length 1126.1
  Top Layer w10: v1(1240,1691.85) 1230,1701.85 1276.26,1748.11 J7.16 ; v1(1880,1900) 1900,1900 1928.46,1928.46 U3.16 U3.16@2021.18,1930
  Bottom Layer w10: v1(1240,1691.85) 1481.85,1691.85 1570,1780 1685,1780 1805,1900 v1(1880,1900) v1@1885,1900
MISO1_SE: P22.2 U3.24 | length 517
  Top Layer w10: U3.24 2304.36,1948.15 2510,2153.79 2510,2175 P22.2
MISO2_N: J8.15 U3.12 | length 1201.9
  Top Layer w10: v1(1300,2465) 1350.09,2515.09 J8.15 ; v1(1840,2050) 1893.79,2050 1936.58,2007.2 U3.12
  Bottom Layer w10: v1@1300,2460 v1(1300,2465) 1645,2465 1832.5,2277.5 v1@1832.5,2057.5
  Bottom Layer w15: v1@1832.5,2057.5 v1(1840,2050)
MISO2_P: J8.16 U3.11 | length 1274.6
  Top Layer w10: v1(1260.09,2515.09) 1279.78,2534.78 J8.16 ; v1(1875,2100) 1885,2100 1958.11,2026.89 U3.11
  Bottom Layer w10: v1@1260,2515 v1(1260.09,2515.09) 1639.91,2515.09 1875,2280 v1(1875,2100) v1@1890,2085
MISO2_SE: P22.4 U3.27 | length 567.6
  Top Layer w10: U3.27 2320.84,2007.2 2480,2166.36 2480,2245 P22.4
MISO3_N: J7.6 U3.19 | length 1155.4
  Top Layer w10: v1(1240,1555) 1243.74,1551.26 J7.6 ; v1(1840,1745) 1890,1745 1920,1775 1920,1833.79 1955.62,1869.41 U3.19
  Bottom Layer w10: v1@1240,1551.26 1441.26,1551.26 1590,1700 1795,1700 v1(1840,1745) ; v1(1240,1555) v1@1250,1555
MISO3_P: J7.4 U3.18 | length 1057.8
  Top Layer w10: v1(1308.97,1511.03) 1308.11,1511.89 J7.4 ; v1(1875,1800) 1875,1810 1954.09,1889.09 U3.18
  Bottom Layer w10: v1(1308.97,1511.03) 1310,1510 1445,1510 1595,1660 1825,1660 1875,1710 v1(1875,1800)
MISO3_SE: P22.1 U3.23 | length 612.7
  Top Layer w10: U3.23 2305.89,1928.46 2612.43,2235 2665,2235 2715,2285 P22.1
MISO4_N: J8.6 U3.14 | length 1326.4
  Top Layer w10: v1(1242.61,2357.61) 1337.39,2357.61 1357.07,2337.93 J8.6 ; v1(1840,1955) 1895,1955 1907.83,1967.83 U3.14
  Bottom Layer w10: v1@1240,2355 v1(1242.61,2357.61) 1242.61,2067.39 1340,1970 1825,1970 v1(1840,1955)
MISO4_P: J8.4 U3.13 | length 1119.5
  Top Layer w10: v1(1305,2305) 1311.44,2298.56 J8.4 ; v1(1880,2005) 1905,2005 1922.48,1987.52 U3.13
  Bottom Layer w10: v1(1305,2305) 1305,2070 1370,2005 v1(1880,2005)
MISO4_SE: P22.3 U3.26 | length 675.8
  Top Layer w10: U3.26 2322.52,1987.52 2495,2160 2495,2238.79 2596.21,2340 2675,2340 P22.3
MISO5_N: J9.15 U3.7 | length 1959.4
  Top Layer w10: v1(1305,3245) 1361.76,3301.76 J9.15 ; U3.7 1980.93,2105.63 1910,2176.56 1910,2437.28 2055,2582.28 v1(2055,2755)
  Bottom Layer w10: v1@1295,3245 v1(1305,3245) 1675,3245 2050,2870 v1@2050,2755
MISO5_P: J9.16 U3.6 | length 2067.8
  Top Layer w10: v1(1265,3300) 1280,3300 1301.44,3321.44 J9.16 ; U3.6 1982.46,2125.32 1925,2182.77 1925,2431.07 2090,2596.07 v1(2090,2820)
  Bottom Layer w10: v1(1265,3300) 1675,3300 2090,2885 v1(2090,2820)
MISO5_SE: P22.6 U3.32 | length 601.9
  Top Layer w10: U3.32 2376.84,2105.63 2450,2178.79 2450,2315 P22.6
MISO6_N: J10.15 U3.2 | length 2596.9
  Top Layer w10: v1(1315,4040) 1363.43,4088.43 J10.15 ; U3.2@2021.97,2203.31 1991.69,2203.31 1970,2225 1970,2412.43 2260,2702.43 v1(2260,2820)
  Bottom Layer w10: v1@1310,4040 v1(1315,4040) 1425,4040 2260,3205 v1(2260,2820)
MISO6_P: J10.16 U3.1 | length 2718.6
  Top Layer w10: v1(1266.57,4088.43) 1342.21,4088.43 1358.12,4104.33 1431.14,4104.33 J10.16 ; U3.1 1998.25,2223.74 1985,2236.99 1985,2406.21 2275,2696.21 2275,2705 2295,2725 v1(2295,2755)
  Bottom Layer w10: v1@1265,4090 v1(1266.57,4088.43) 1280,4075 1435,4075 2295,3215 v1(2295,2755)
MISO6_SE: P22.8 U3.35 | length 652.6
  Top Layer w10: U3.35 2393.47,2164.69 2420,2191.21 2420,2385 P22.8
MISO7_N: J9.6 U3.9 | length 1878.6
  Top Layer w10: v1@1264.28,3144.28 v1(1265,3145) 1325,3145 1345.41,3124.59 J9.6 ; v1(1985,2755) 1985,2554.71 1880,2449.71 1880,2164.13 1977.87,2066.26 U3.9
  Bottom Layer w10: v1(1265,3145) 1395,3145 1785,2755 v1(1985,2755)
MISO7_P: J9.4 U3.8 | length 1977
  Top Layer w10: v1(1310,3095) 1319.78,3085.22 J9.4 ; v1(2015,2820) 2020,2815 2020,2568.49 1895,2443.49 1895,2170.35 1979.4,2085.94 U3.8
  Bottom Layer w10: v1@1310,3090 v1(1310,3095) 1395,3095 1785,2705 2000,2705 2020,2725 2020,2815 v1(2015,2820)
MISO7_SE: P22.5 U3.31 | length 710.1
  Top Layer w10: U3.31 2378.37,2085.94 2465,2172.57 2465,2308.79 2596.21,2440 2675,2440 P22.5
MISO8_N: J10.6 U3.4 | length 2695.2
  Top Layer w10: v1(1264.06,3930.94) 1329.06,3930.94 1348.74,3911.26 J10.6 ; U3.4 1985.51,2164.69 1940,2210.2 1940,2424.85 2190,2674.85 v1(2190,2820)
  Bottom Layer w10: v1@1260,3935 v1(1264.06,3930.94) 1230,3896.89 1230,3845 1240,3835 1535,3835 2190,3180 v1(2190,2820)
MISO8_P: J10.4 U3.3 | length 2521.4
  Top Layer w10: v1(1295,3875) 1298.11,3871.89 J10.4 ; U3.3 1987.04,2184.37 1955,2216.41 1955,2418.64 2225,2688.64 v1(2225,2755)
  Bottom Layer w10: v1(1295,3875) 1300.24,3869.76 1545.24,3869.76 2225,3190 v1(2225,2755)
MISO8_SE: P22.7 U3.34 | length 781.3
  Top Layer w10: U3.34 2395,2145 2435,2185 2435,2378.79 2580.74,2524.53 2694.53,2524.53 2720,2550 P22.7
MOSI1_N: J7.13 U4.57 | length 1888.5
  Top Layer w10: J7.13 1559.06,1689.06 1600,1730 1600,1894.96 1650,1944.96 1650,2211.21 1700,2261.21 1700,2496.51 1780,2576.51 1780,3130 1845.04,3195.04 U4.57
MOSI1_P: J7.14 U4.58 | length 1872.2
  Top Layer w10: J7.14 1533.74,1708.74 1560,1735 v1(1560,1820) ; v1(1640,1825) 1640,1913.75 1665,1938.75 1665,2205 1725,2265 1725,2500.29 1795,2570.29 1795,3115 1855.35,3175.35 U4.58
  Bottom Layer w10: v1(1560,1820) 1635,1820 v1(1640,1825)
MOSI1_SE: P22.11 U4.9 | length 732.4
  Top Layer w10: U4.9 2380.28,3214.72 2430,3165 2430,2980 2575,2835 2660,2835 2710,2785 P22.11
MOSI2_N: J8.13 U4.49 | length 1275.7
  Top Layer w10: J8.13 1530.72,2475.72 1590,2535 1590,2685 1660,2755 1660,3223.79 1788.73,3352.52 U4.49
MOSI2_P: J8.14 U4.50 | length 1374.1
  Top Layer w10: J8.14 1520.41,2495.41 1565,2540 1565,2650 1550,2665 v1(1530,2665) ; v1(1630,2635) 1630,2703.79 1675,2748.79 1675,3217.57 1790.26,3332.83 U4.50
  Bottom Layer w10: v1(1530,2665) 1605,2665 1615,2655 1615,2650 v1(1630,2635)
MOSI2_SE: P21.3 U4.14 | length 617
  Top Layer w10: U4.14 2366.7,3313.15 2490,3189.85 2490,3130 2575,3045 2660,3045 P21.3
MOSI3_N: J7.9 U4.61 | length 1868
  Top Layer w10: J7.9 1565.32,1610.32 1710,1755 1710,2186.36 1770,2246.36 1770,2481.65 1840,2551.65 1840,3070 1886.3,3116.3 U4.61
MOSI3_P: J7.7 U4.62 | length 1871
  Top Layer w10: J7.7 1547.16,1570.94 1725,1748.79 1725,2180.15 1785,2240.15 1785,2475.44 1855,2545.44 1855,3055 1896.61,3096.61 U4.62
MOSI3_SE: P22.9 U4.7 | length 791.2
  Top Layer w10: U4.7 2377.22,3175.35 2400,3152.57 2400,2910 2575,2735 2665,2735 2715,2685 P22.9
MOSI4_N: J8.9 U4.53 | length 1258.1
  Top Layer w10: J8.9 1515.62,2396.98 1720,2601.36 1720,3190 1803.78,3273.78 U4.53
MOSI4_P: J8.7 U4.54 | length 1261.1
  Top Layer w10: J8.7 1497.46,2357.61 1735,2595.15 1735,3175 1814.09,3254.09 U4.54
MOSI4_SE: P21.1 U4.12 | length 673.6
  Top Layer w10: U4.12 2274.5,3273.28 2306.65,3273.28 2308.37,3275 2362.43,3275 2460,3177.43 2460,3066.21 2591.21,2935 2655,2935 2705,2885 P21.1
MOSI5_N: J9.13 U4.41 | length 729.7
  Top Layer w10: J9.13 1527.39,3262.39 1620,3355 1620,3486.57 1643.43,3510 U4.41
MOSI5_P: J9.14 U4.42 | length 765.6
  Top Layer w10: J9.14 1517.07,3282.07 1575,3340 v1(1575,3470) ; v1@1655,3455.16 1660,3460.16 v1(1660,3470) 1735,3470 1755.32,3490.32 U4.42
  Bottom Layer w10: v1(1660,3470) v1(1575,3470) ; v1(1575,3470) 1567.5,3477.5 1560,3470 v1(1575,3470)
MOSI5_SE: P21.7 U4.22 | length 611.2
  Top Layer w10: U4.22 2274.63,3470 2440,3470 2550,3360 2550,3280 2590,3240 2665,3240 P21.7
MOSI6_N: J10.13 U4.33 | length 749.1
  Top Layer w10: J10.13 1560.95,4049.05 v1(1570,4040) ; v1(1645,4040) 1645,3970 1947.52,3667.48 U4.33
  Bottom Layer w10: v1(1570,4040) v1(1645,4040)
MOSI6_P: J10.14 U4.34 | length 792.3
  Top Layer w10: J10.14 1543.74,4068.74 1555,4080 1590,4080 1610,4060 1610,3993.64 1630,3973.64 1630,3940 1922.2,3647.8 U4.34
MOSI6_SE: P21.11 U4.27 | length 529.4
  Top Layer w10: U4.27@2274.94,3570 U4.27 2425.8,3569.06 2559.85,3435 2680,3435 2720,3395 P21.11
MOSI7_N: J9.9 U4.45 | length 652.6
  Top Layer w10: J9.9 1528.65,3183.65 1776.26,3431.26 U4.45
MOSI7_P: J9.7 U4.46 | length 660.8
  Top Layer w10: J9.7 1510.49,3144.28 1777.79,3411.57 U4.46
MOSI7_SE: P21.5 U4.20 | length 672.2
  Top Layer w10: U4.20 2436.31,3431.26 2520,3347.57 2520,3206.21 2591.21,3135 2670,3135 P21.5
MOSI8_N: J10.9 U4.37 | length 778.4
  Top Layer w10: J10.9 1569.69,3970.31 1585,3955 1585,3835 1831.26,3588.74 U4.37
MOSI8_P: J10.7 U4.38 | length 761.5
  Top Layer w10: J10.7 1549.06,3930.94 1570,3910 1570,3805 1805.94,3569.06 U4.38
MOSI8_SE: P21.9 U4.25 | length 562.7
  Top Layer w10: U4.25 2422.74,3529.69 2580,3372.43 2580,3346.21 2596.21,3330 2675,3330 P21.9
nCS1_N: J7.1 U4.63 | length 2115.5
  Top Layer w10: J7.1 v1@1637.17,1452.83 ; v1@1635,1455 v1@1637.17,1452.83 ; v1(1645,1605) 1645,1647.57 1740,1742.57 1740,2173.93 1800,2233.93 1800,2469.23 1870,2539.23 1870,3040 1906.93,3076.93 U4.63 ; v1@1637.17,1452.83 1640,1450 v1(1645,1450) 1647.83,1452.83 v1@1637.17,1452.83
  Bottom Layer w10: v1(1645,1450) 1645,1580 ; v1(1645,1605) v1@1645,1600 ; v1@1650,1585 v1@1655,1590 ; v1@1657.5,1592.5 v1@1655,1590 ; 1645,1580 v1@1645,1600 ; 1645,1580 1635,1590 v1@1645,1600 ; v1@1645,1600 1655,1610 v1@1655,1590
nCS1_P: J7.3 U4.64 | length 1930.6
  Top Layer w10: J7.3 1597.2,1492.2 1690,1585 1690,1671.36 1755,1736.36 1755,2167.72 1815,2227.72 1815,2463.02 1885,2533.02 1885,3030 1912.24,3057.24 U4.64
nCS2_N: J8.1 U4.55 | length 1440.3
  Top Layer w10: J8.1 1579.5,2239.5 v1(1640,2300) ; v1(1603.79,2410) 1603.79,2442.72 1750,2588.93 1750,3160 1824.41,3234.41 U4.55
  Bottom Layer w10: v1(1603.79,2410) 1603.79,2321.21 1625,2300 v1(1640,2300)
nCS2_P: J8.3 U4.56 | length 1306.8
  Top Layer w10: J8.3 1528.87,2278.87 1660,2410 1660,2477.72 1765,2582.72 1765,3145 1834.72,3214.72 U4.56
nCS3_N: J9.1 U4.47 | length 840.1
  Top Layer w10: J9.1 1576.17,3026.17 v1(1620,3070) ; v1(1605,3175) 1605,3215 1781.89,3391.89 U4.47
  Bottom Layer w10: v1@1600,3185 v1@1605,3180 ; v1(1620,3070) 1595,3095 1595,3165 v1(1605,3175) ; v1(1605,3175) 1610,3175 v1@1605,3180 ; v1(1605,3175) v1@1605,3180
nCS3_P: J9.3 U4.48 | length 721
  Top Layer w10: J9.3 1555.54,3065.54 1645,3155 1645,3230 1787.2,3372.2 U4.48
nCS4_N: J10.1 U4.39 | length 672.5
  Top Layer w10: J10.1 1434.92,3790.08 v1(1540,3685) ; v1(1635,3685) 1770.63,3549.37 U4.39
  Bottom Layer w10: v1(1540,3685) v1(1635,3685)
nCS4_P: J10.3 U4.40 | length 762.8
  Top Layer w10: J10.3 1552.8,3852.2 1555,3850 1555,3795 1580,3770 1580,3690 1740.31,3529.69 U4.40
NetR1_1: R1.1 U4.5 | length 242.7
  Top Layer w10: R1.1 2200,3115 2220.98,3135.98 U4.5
NetR2_1: R2.1 U4.10 | length 415.7
  Top Layer w10: R2.1 2065,3110 2189.41,3234.41 U4.10
NetR6_1: R6.1 U3.36 | length 156.7
  Top Layer w10: R6.1 2205,2290.2 2205,2195 2215.63,2184.37 U3.36
NetR10_1: R10.1 U4.23 | length 416
  Top Layer w10: R10.1 2060,3694.5 2092.2,3662.29 2092.2,3607.8 2209.69,3490.31 U4.23
NetR11_1: R11.1 U3.33 | length 272.5
  Top Layer w10: R11.1 2085,2240.32 2200,2125.32 U3.33
NetR14_1: R14.1 U4.28 | length 261.9
  Top Layer w10: R14.1 2185,3620 2216.26,3588.74 U4.28
NetR15_1: R15.1 U3.25 | length 364.4
  Top Layer w10: R15.1 2165,1799.8 2165,1920 2212.83,1967.83 U3.25
NetR16_1: R16.1 U3.22 | length 250
  Top Layer w10: R16.1 2195,1885 2218.78,1908.78 U3.22
SCLK1_N: J7.12 U4.59 | length 1865.7
  Top Layer w10: J7.12 1574.37,1669.37 1680,1775 1680,2198.79 1740,2258.79 1740,2494.08 1810,2564.08 1810,3100 1865.67,3155.67 U4.59
SCLK1_P: J7.10 U4.60 | length 1868.7
  Top Layer w10: J7.10 1556.21,1630 1695,1768.79 1695,2192.57 1755,2252.57 1755,2487.87 1825,2557.87 1825,3085 1875.98,3135.98 U4.60
SCLK1_SE: P22.12 U4.8 | length 624.2
  Top Layer w10: U4.8 2378.75,3195.04 2415,3158.79 2415,2973.79 2568.79,2820 2570,2820 2605,2785 P22.12
SCLK2_N: J8.12 U4.51 | length 1255.2
  Top Layer w10: J8.12 1532.25,2456.04 1690,2613.79 1690,3211.36 1791.79,3313.15 U4.51
SCLK2_P: J8.10 U4.52 | length 1263.3
  Top Layer w10: J8.10 1514.09,2416.67 1705,2607.57 1705,3205.15 1793.32,3293.46 U4.52
SCLK2_SE: P21.4 U4.13 | length 508.8
  Top Layer w10: U4.13 2365.18,3293.46 2475,3183.64 2475,3123.79 2613.79,2985 P21.4
SCLK3_N: J9.12 U4.43 | length 644.5
  Top Layer w10: J9.12 1532.7,3242.7 1760.63,3470.63 U4.43
SCLK3_P: J9.10 U4.44 | length 652.6
  Top Layer w10: J9.10 1518.33,3203.33 1765.94,3450.94 U4.44
SCLK3_SE: P21.8 U4.21 | length 506.6
  Top Layer w10: U4.21@2274.94,3450 U4.21 2437.84,3450.94 2535,3353.79 2535,3270 P21.8
SCLK4_N: J10.12 U4.35 | length 749.9
  Top Layer w10: J10.12 1531.13,4029.37 1555.5,4005 1577.43,4005 1615,3967.43 1615,3910 1896.89,3628.11 U4.35
SCLK4_P: J10.10 U4.36 | length 758.6
  Top Layer w10: J10.10 1571.21,3990 1600,3961.21 1600,3875 1866.57,3608.43 U4.36
SCLK4_SE: P21.12 U4.26 | length 414.1
  Top Layer w10: U4.26 2424.27,3549.37 2588.64,3385 P21.12

## Polygon pours and split planes (outlines as drawn)
bVSTIM+ on Signal Layer 1 "Signal Layer 1-bVSTIM+" (solid, pour order 60): 2220,1170 2545,1495 2775,1495 2775,1595 1475,1595 1475,4385 1280,4385 1280,1170
bVSTIM- on Signal Layer 1 "Signal Layer 1-bVSTIM-" (solid, pour order 58): 1000,1000 2775,1000 2764.97,1555.53 2515.53,1555.53 2222.7,1262.7 1280,1262.7 1280,4445 1000,4445
bVDD on Signal Layer 1 "VDD" (solid, pour order 28): 2320,4450 2320,4185 2120,4185 1471.8,4185 1471.8,1400.9 1724.1,1400.9 1725,1400 1920,1595 2775,1595 2775,4450
cGND on Top Layer "Top Layer-cGND" (solid, pour order 56): 1000,1000 1170,1000 1330,1000 2775,1000 2775,1375 1446.76,1375 1173.47,1375 1173.47,1885 1470,1885 1470,2160 1173.47,2160 1173.47,2702.1 1465,2702.1 1465,2950 1173.47,2950 1173.47,3490.65 1175.35,3488.77 1470,3488.77 1470,3735 1173.47,3735 1173.47,4245 1470,4245 1470,4450 1000,4450
bGND on Top Layer "Top Layer-No Net 2" (solid, pour order 52): 2274,3057.24 1985,3057.24 1980,3062.24 1980,3667.48 2274,3667.48 2275,3668.48
bGND on Top Layer "Top Layer-No Net 2" (solid, pour order 50): 2022.72,1869.41 2255,1869.41 2255,2223.74 2022.72,2223.74
cGND on Bottom Layer "Bottom Layer-cGND" (solid, pour order 62): 1330,1000 2775,1000 2775,1375 1446.96,1375 1173.47,1375 1173.47,1885 1470,1885 1470,2160 1173.47,2160 1173.47,2702.1 1465,2702.1 1465,2950 1173.47,2950 1173.47,3490.65 1175.35,3488.77 1470,3488.77 1470,3735 1173.47,3735 1173.47,4245 1470,4245 1470,4450 1000,4450 1000,1000 1170,1000
bGND on Signal Layer 2 "Signal Layer 2-No Net" (solid, pour order 54): 1000,1000 2775,1000 2775,4445 2770,4450 1000,4450

## Silkscreen, mask and mechanical layers (free items; w line width, h text height)
Top Overlay:
  text "VS-" at 1555,4290 h60
  text "VS+" at 1555,3510 h60
  text "VS-" at 1555,2720 h60
  text "VS+" at 1555,1930 h60
  text "VDD" at 2310,1710 h60
  text "GND" at 2310,1610 h60
  text "VS+" at 2310,1510 h60
  text "VS-" at 2310,1415 h60
  text "CGND" at 2365,1315 h30
PCB Info - M3 (Mech3):
  the board outline again, w5.91

## Text inside footprints (layer, text, board x,y; h text height)
L2: Top Overlay "to" at 1880.39,1157.32 h118.11; Top Overlay "Brain" at 2018.19,1157.32 h118.11; Top Overlay "Neuron" at 1476.85,1157.32 h118.11; Top Overlay "2019" at 2175.67,1098.27 h51.18; Top Overlay "LABORATORY" at 1476.85,1098.27 h51.18
U4: Top Overlay "*" at 2296.5,3051.24 h50 r180; Mechanical 13 "*" at 2296.5,3051.24 h50 r180; Mechanical 7 "Default Padstyle: RX66Y11D0T" at 2479.5,3898.86 h50 r180; Mechanical 7 "Pin One Padstyle: RX66Y11D0T" at 2479.5,3973.86 h50 r180; Mechanical 7 "Alt 1 Padstyle: OX60Y90D30P" at 2467,4048.86 h50 r180; Mechanical 7 "Alt 2 Padstyle: OX90Y60D30P" at 2467,4123.86 h50 r180; Mechanical 7 "1.968504E-02in/.5mm" at 2631.5,3079.59 h25 r180